# EAGLE board LibreRouter_MegaBoard (EAGLE 7.5.0), part 1 of 3
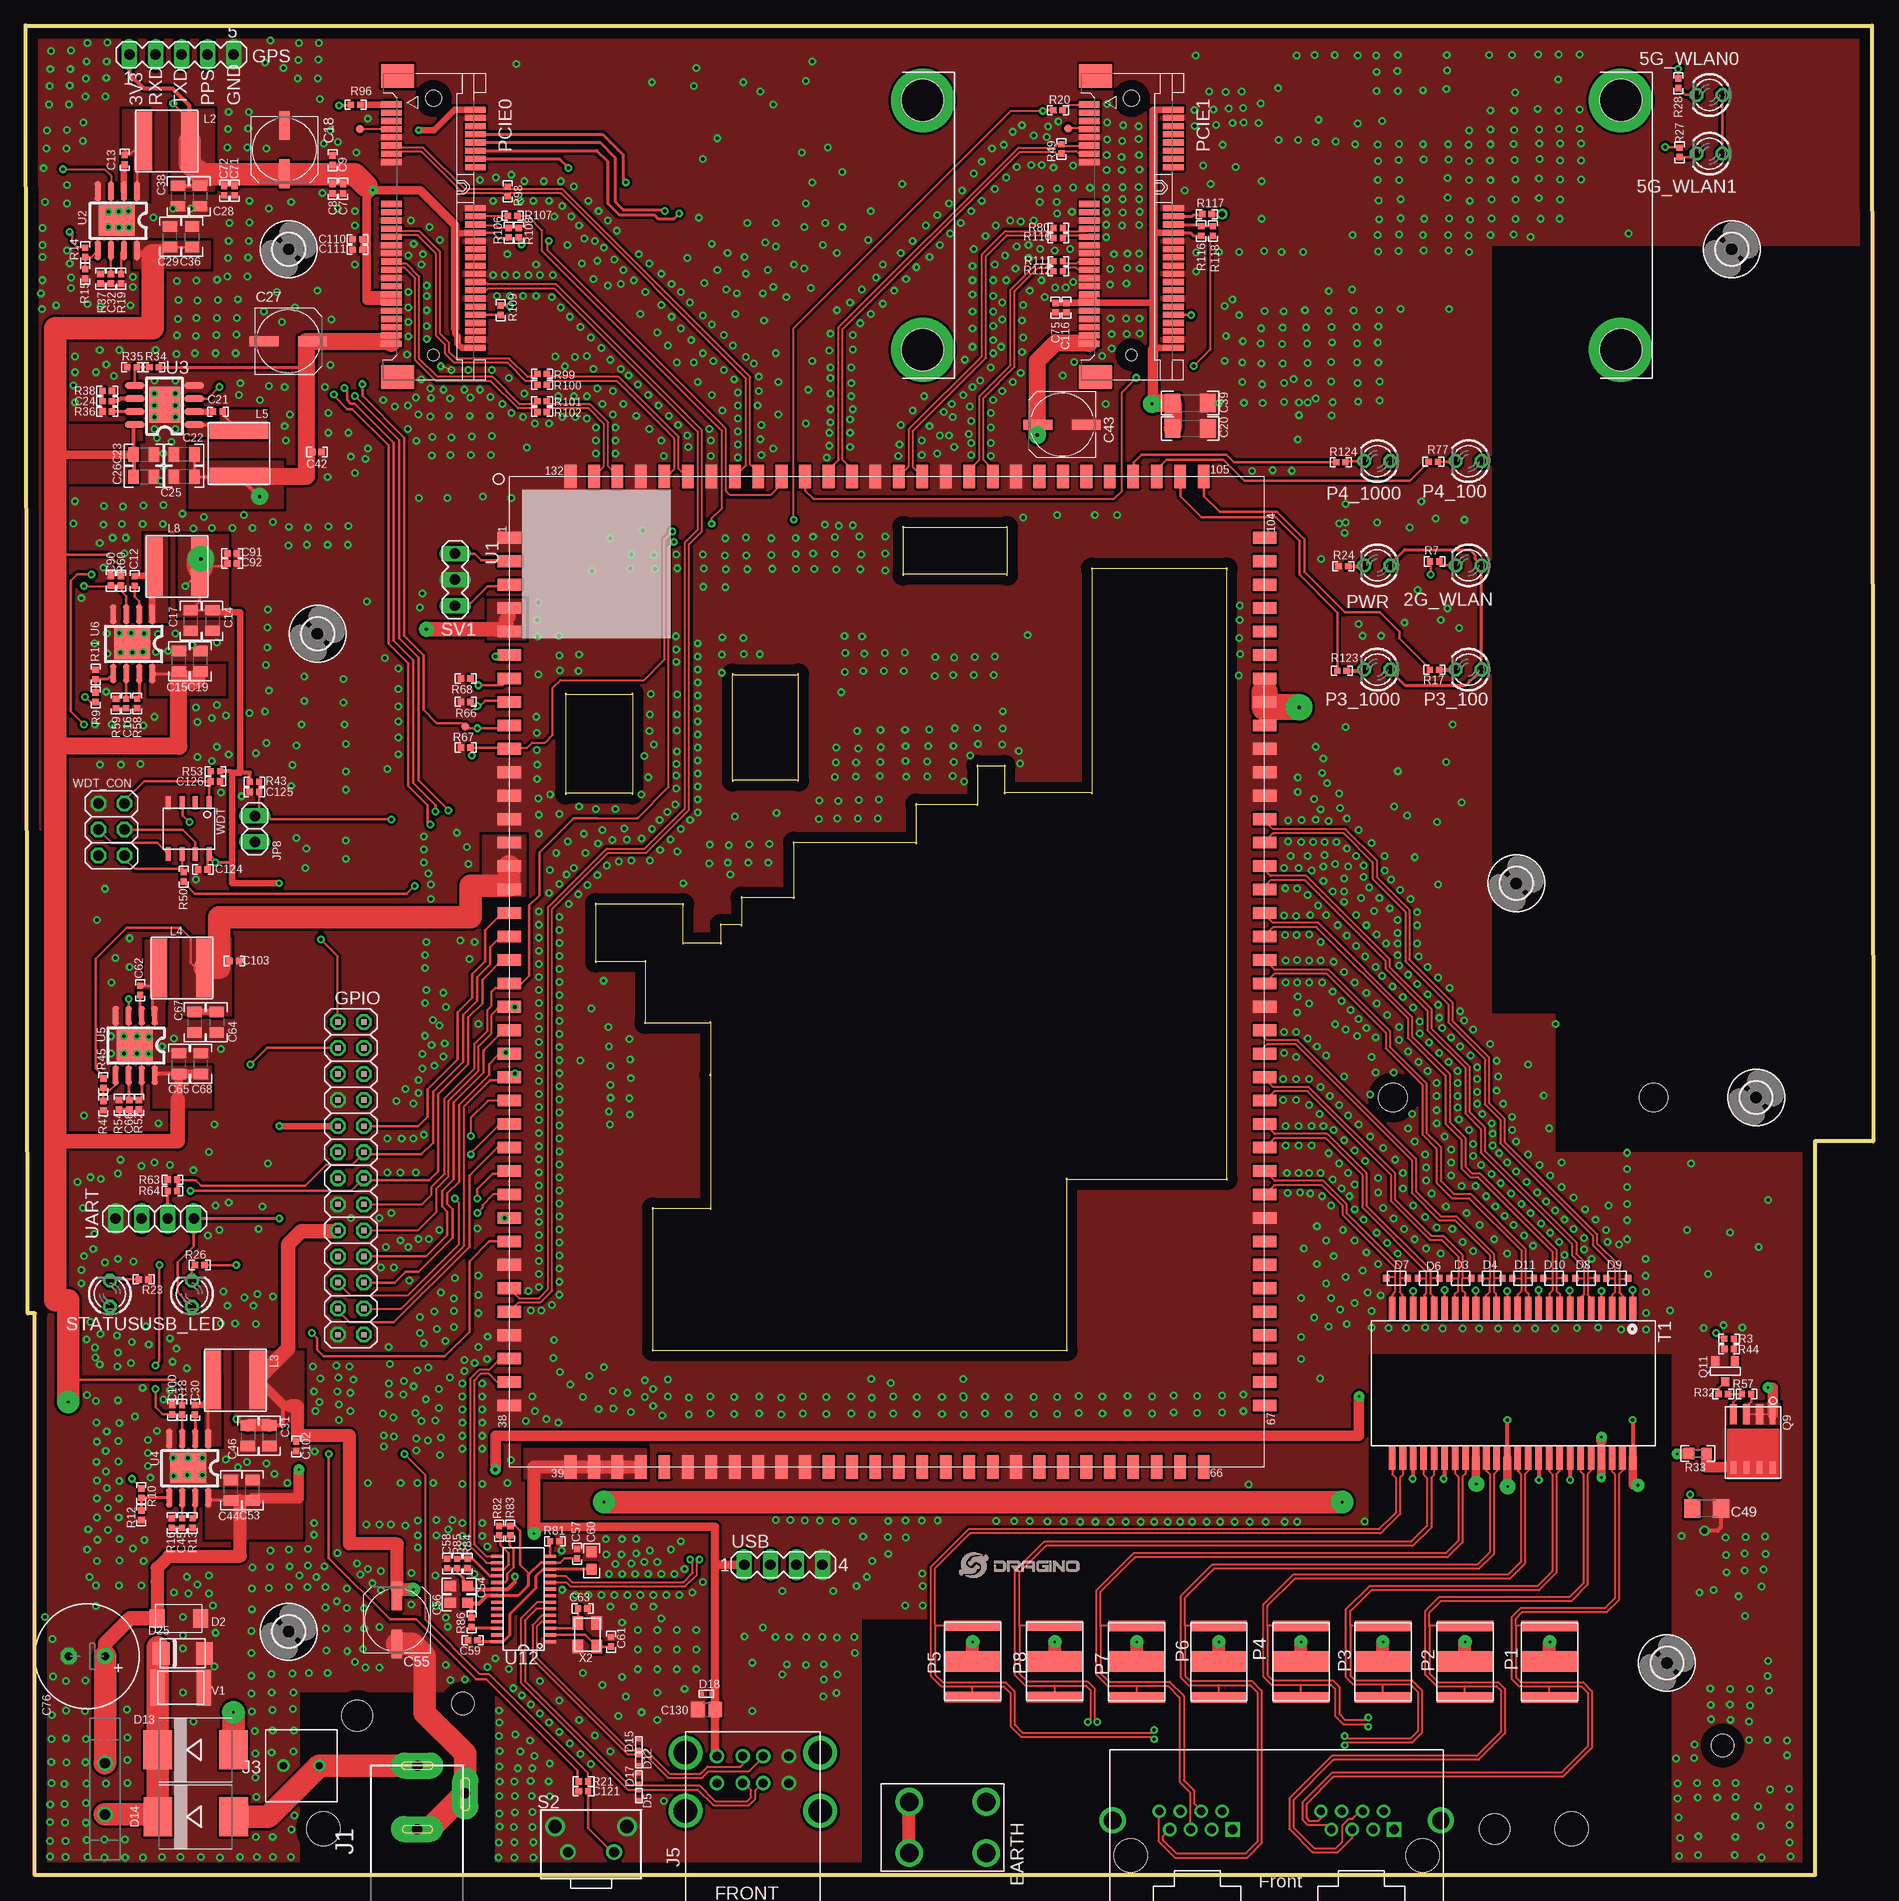
[diagram p0: board, top side]
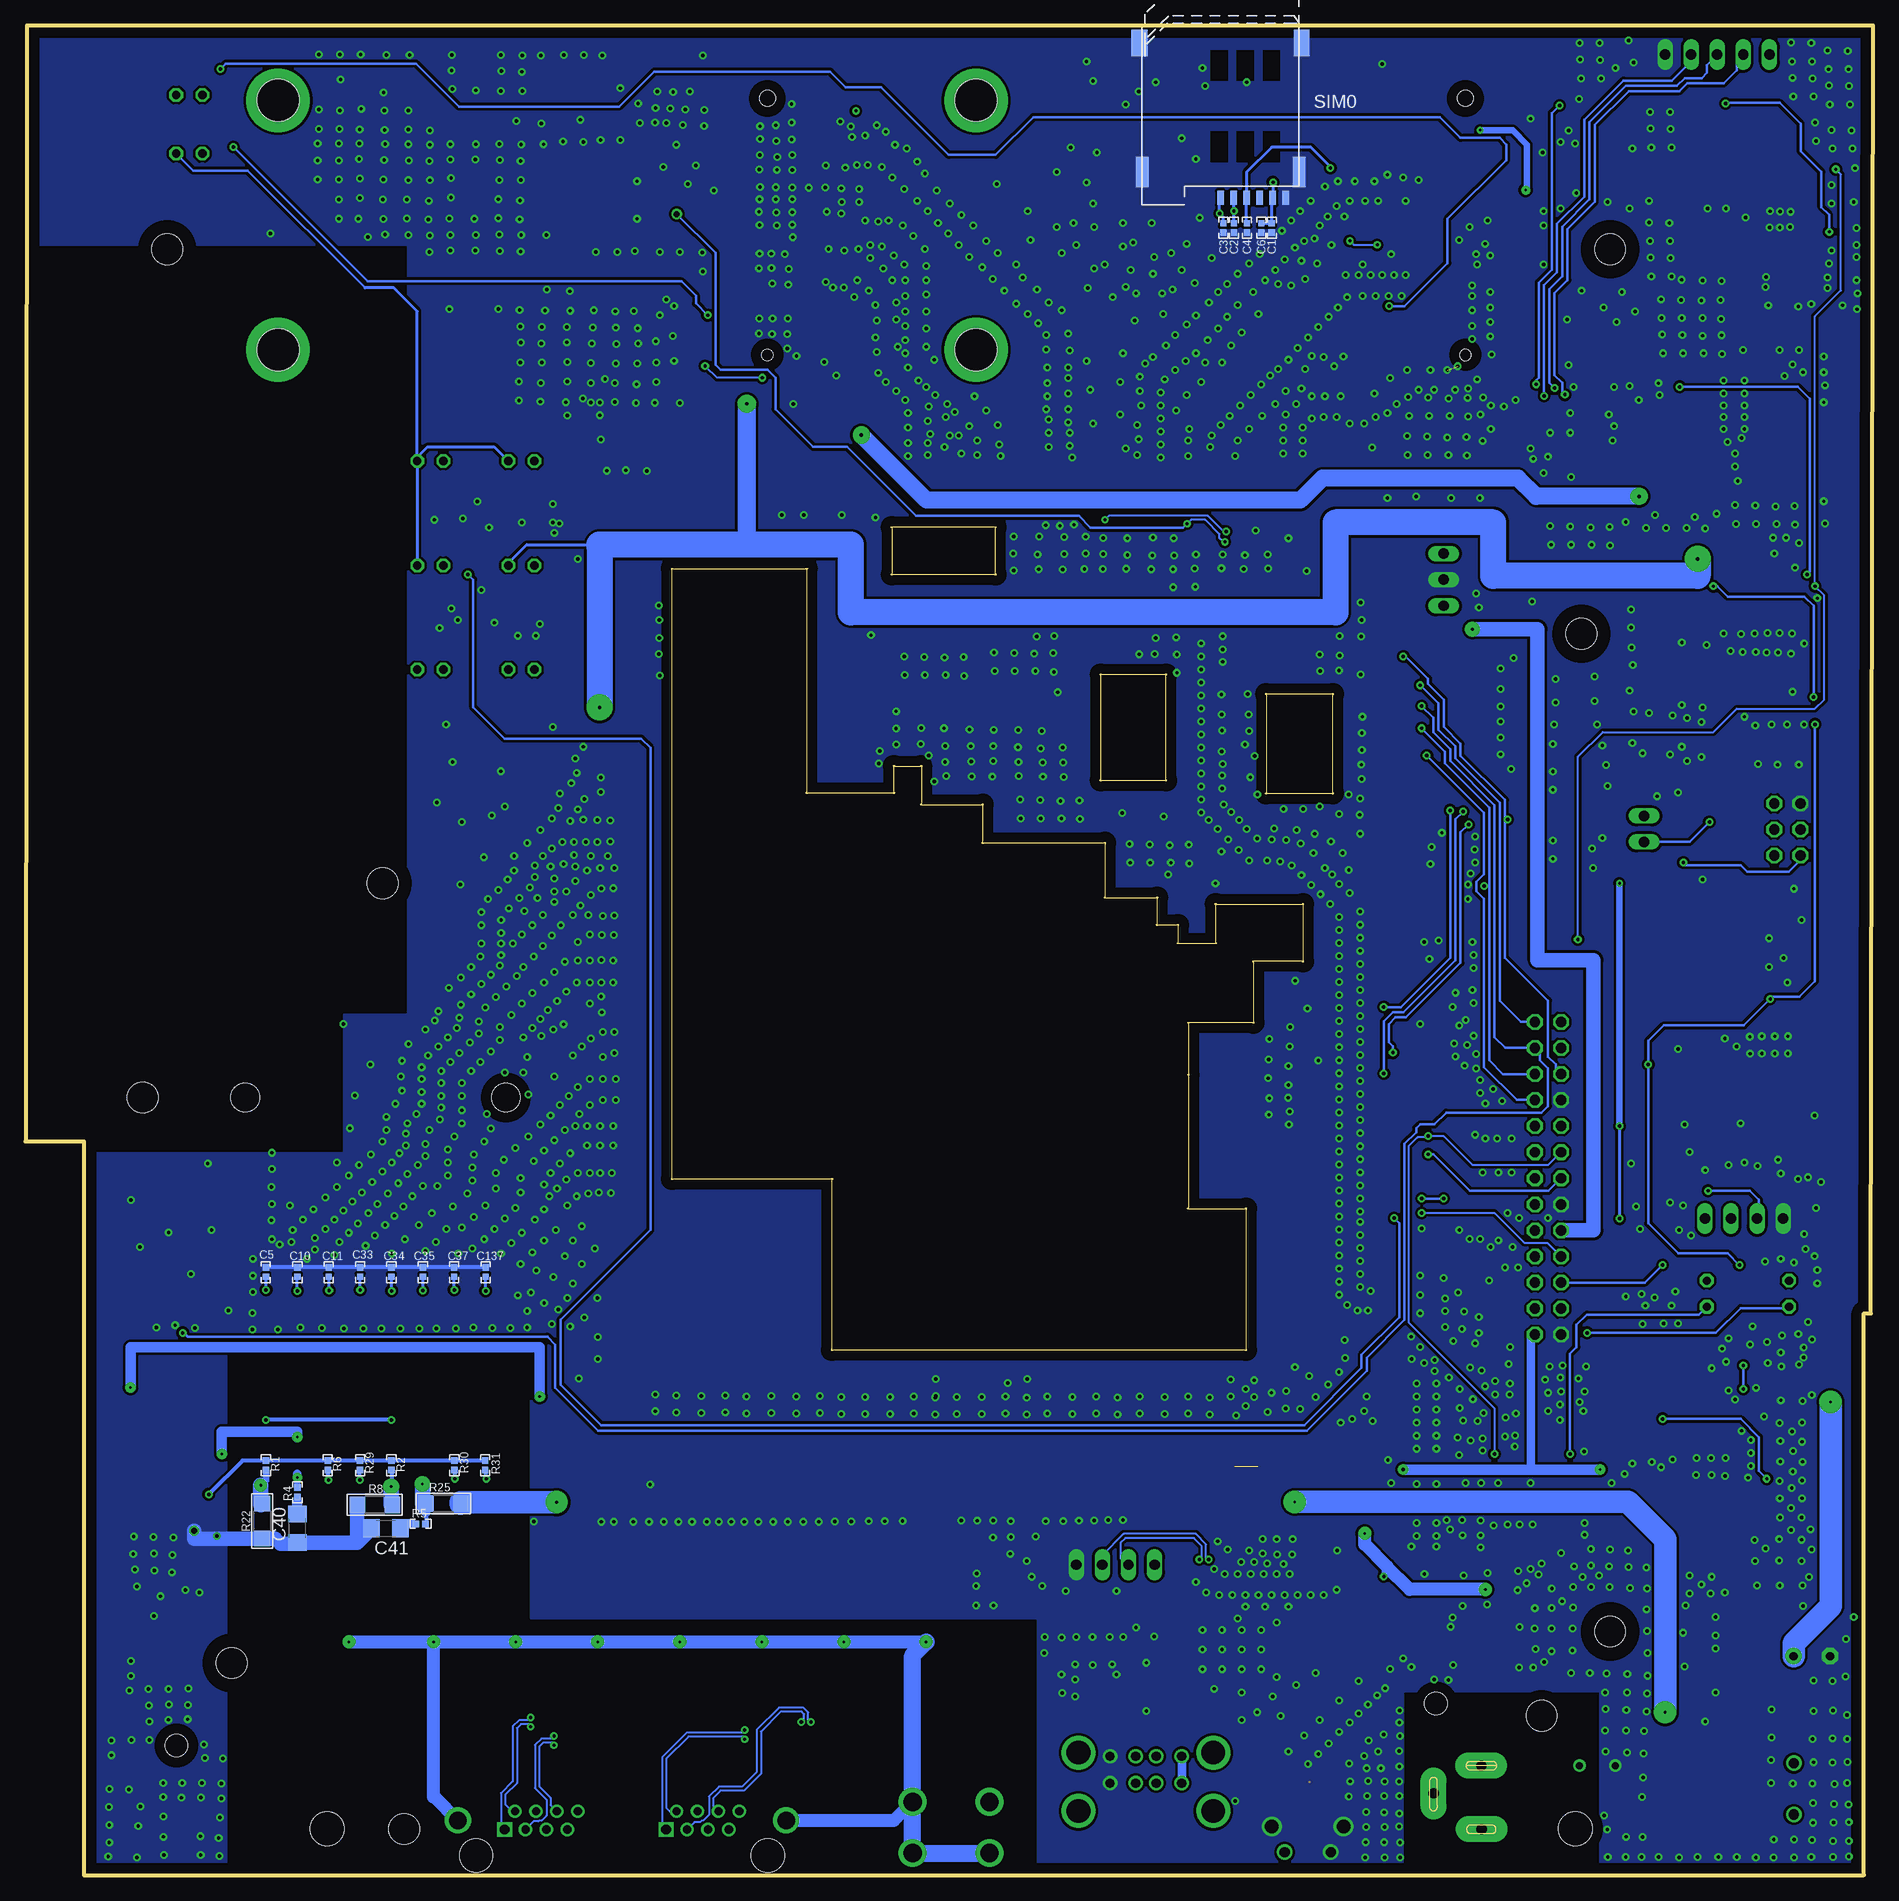
[diagram p1: board, bottom side, seen from below]

Size 180.12 x 180.27 mm. Coordinates in mm from the lower left corner, seen from the top.
Outline: 174.45,0 0.89,0 0.89,54.76 0.21,54.76 0,180.27 179.99,180.27 180.12,71.53 174.45,71.53 174.45,0
Copper layers (1*16): Top 0.035mm / dielectric 1.5mm / Bottom 0.035mm
Design rules "default *": minimum track width 8mil, minimum drill 12mil, track to track 6mil, track to pad 6mil, pad to pad 6mil, via to via 6mil, smd to smd 6mil, copper to edge 40mil, drill to drill 8mil, minimum pad ring 10mil, minimum via ring 8mil, stop-mask expansion 1mil, vias tented up to drill 30mil, thermal gap 10mil
Net classes: 0 default: width 0.203 mm, clearance 0.152 mm; 1 vcc: width 0.254 mm; 2 gnd: width 0.305 mm, drill 0.33 mm, clearance 0.254 mm; 3 usbvcc: width 0.254 mm, drill 0.61 mm, clearance 0.254 mm; 4 aref: width 0.406 mm, drill 0.61 mm, clearance 0.254 mm; 5 usbtrace: width 0.254 mm, clearance 0.152 mm; 6 usbtrace-4layer: width 0.191 mm, clearance 0.203 mm
Holes 3.3 mm at 29.03,4.52 150.73,4.52
Holes 3 mm at 32.33,15.52 143.21,4.5
Holes 2.2 mm at 42.63,16.72 165.43,12.62
Holes 2.8 mm at 133.31,75.79 158.71,75.79

## Footprints (pad centres in the part's own frame; a part is rotated, then mirrored left to right if it is on the bottom)
LED3MM = drill 0.813 octagon: A -1.27,0; K 1.27,0
C0402 = smd 0.61 x 0.61: 1 -0.457,0; 2 0.457,0
C0805 = smd 1 x 1.4: 1 -1,0; 2 1,0
UD-6,3X7,7_NICHICON = smd 2.8 x 1: + 2.35,0; - -2.35,0
C1206 = smd 1.52 x 1.8: 1 -1.71,0; 2 1.71,0
C1206' = smd 1.6 x 1.8: 1 -1.4,0; 2 1.4,0
C0603 = smd 1.1 x 1: 1 -0.85,0; 2 0.85,0
UD-6,3X5,8_NICHICON = smd 2.8 x 1: + 2.35,0; - -2.35,0
E3,5-10 = drill 0.813 pad 1.6: + -1.778,0 | drill 0.813 pad 1.6 octagon: - 1.778,0
C0805' = smd 1.3 x 1.5: 1 -0.85,0; 2 0.85,0
DO214AC = smd 1.45 x 1.8: A 2.13,0; C -2.13,0
SOD−323 = smd 0.6 x 0.7: P$1 -1.05,0; P$2 1.05,0
SOD−923 = smd 0.3 x 0.4: P$1 -0.45,0; P$2 0.45,0
SMC = smd 2.8 x 3.8: A 3.7,0; C -3.7,0
DO-214AA = smd 1.62 x 2.18: A 2.11,0; C -2.11,0
M4 = drill 1.8: 1 -3.75,2.5; 2 3.75,2.5; 3 -3.75,-2.5; 4 3.75,-2.5
2X13 = drill 1.016 octagon: 1 -15.24,-1.27; 2 -15.24,1.27; 3 -12.7,-1.27; 4 -12.7,1.27; 5 -10.16,-1.27; 6 -10.16,1.27; 7 -7.62,-1.27; 8 -7.62,1.27; 9 -5.08,-1.27; 10 -5.08,1.27; 11 -2.54,-1.27; 12 -2.54,1.27; 13 0,-1.27; 14 0,1.27; 15 2.54,-1.27; 16 2.54,1.27; 17 5.08,-1.27; 18 5.08,1.27; 19 7.62,-1.27; 20 7.62,1.27; 21 10.16,-1.27; 22 10.16,1.27; 23 12.7,-1.27; 24 12.7,1.27; 25 15.24,-1.27; 26 15.24,1.27
MA05-1 = drill 1.016 long: 1 -5.08,0; 2 -2.54,0; 3 0,0; 4 2.54,0; 5 5.08,0
3,0 = hole 3: 0,0
POWER_JACK_SLOT = drill 1 pad 2.54 long: GND@1 0,0; GND@2 4.7,3.5; PWR 0.04,6.2
ETHERNET-1X2 = drill 0.94 pad 1.27 square: 1-1 4.305,-2.54; 2-1 -11.445,-2.54 | drill 0.8: 1-2 5.325,-4.32; 1-3 6.345,-2.54; 1-4 7.365,-4.32; 1-5 8.385,-2.54; 1-6 9.405,-4.32; 1-7 10.425,-2.54; 1-8 11.445,-4.32; 2-2 -10.425,-4.32; 2-3 -9.405,-2.54; 2-4 -8.385,-4.32; 2-5 -7.365,-2.54; 2-6 -6.345,-4.32; 2-7 -5.325,-2.54; 2-8 -4.305,-4.32 | drill 1.7: S1 16,-3.43; S2 -16,-3.43 | hole 3.25: -14.225,0; 14.225,0
KF350-2P = drill 0.7: 1 -1.75,0; 2 1.75,0
USB-DUAL-JS-AF10-002 = drill 0.9: 1 0,3.5; 2 0,1; 3 0,-1; 4 0,-3.5; 5 -2.62,3.5; 6 -2.62,1; 7 -2.62,-1; 8 -2.62,-3.5 | drill 2.3: 9 0.35,6.57; 10 0.35,-6.57; 11 -5.33,6.57; 12 -5.33,-6.57
1X02 = drill 1.016 long: 1 -1.27,0; 2 1.27,0
GR72-135 = drill 1: P$1 -2.5,0; P$2 2.5,0
SWPA6028S = smd 5.7 x 1.7: P$1 0,2.25; P$2 0,-2.25
GDT-LT-B3D090L = smd 1 x 5.5: 1 -3.48,0; 3 3.48,0 | smd 2 x 5.5: 2 0,0
MINI-PCI-E-FULL = smd 0.6 x 2: 1 0.6,-4.1; 2 1.1,4.1; 3 1.4,-4.1; 4 1.9,4.1; 5 2.2,-4.1; 6 2.7,4.1; 7 3,-4.1; 8 3.5,4.1; 9 3.8,-4.1; 10 4.3,4.1; 11 4.6,-4.1; 12 5.1,4.1; 13 5.4,-4.1; 14 5.9,4.1; 15 6.2,-4.1; 16 6.7,4.1; 17 10.3,-4.1; 18 10.7,4.1; 19 11.1,-4.1; 20 11.5,4.1; 21 11.9,-4.1; 22 12.3,4.1; 23 12.7,-4.1; 24 13.1,4.1; 25 13.5,-4.1; 26 13.9,4.1; 27 14.3,-4.1; 28 14.7,4.1; 29 15.1,-4.1; 30 15.5,4.1; 31 15.9,-4.1; 32 16.3,4.1; 33 16.7,-4.1; 34 17.1,4.1; 35 17.5,-4.1; 36 17.9,4.1; 37 18.3,-4.1; 38 18.7,4.1; 39 19.1,-4.1; 40 19.5,4.1; 41 19.9,-4.1; 42 20.3,4.1; 43 20.7,-4.1; 44 21.1,4.1; 45 21.5,-4.1; 46 21.9,4.1; 47 22.3,-4.1; 48 22.7,4.1; 49 23.1,-4.1; 50 23.5,4.1; 51 23.9,-4.1; 52 24.3,4.1 | drill 4.09 pad 6.2: 53 0.2,47.7; 54 24.5,47.7 | smd 2.3 x 3.2: M1 27.15,-3.5; M2 -2.2,-3.5 | hole 1.55: 0,0 | hole 1.1: 25,0 | hole 4.09: 0.2,47.7; 24.5,47.7
SI4435 = smd 1.98 x 0.568: P$1 -2.66,1.905 | smd 1.98 x 0.69: P$2 -2.66,0.635; P$3 -2.66,-0.635; P$4 -2.66,-1.905 | smd 1.194 x 0.559: P$5 2.527,-1.905; P$6 2.527,-0.635; P$7 2.527,0.635; P$8 2.527,1.931
SOT-23 = smd 0.787 x 0.889: 1 0,-1.016; 2 -0.95,1.016; 3 0.95,1.016
R0402 = smd 0.61 x 0.61: 1 -0.457,0; 2 0.457,0
R1206 = smd 1.52 x 1.6: 1 -1.71,0; 2 1.71,0
R0603 = smd 1 x 1.1: 1 -0.85,0; 2 0.85,0
SWITCH_6X6X5 = drill 0.991 pad 1.524: 1 -2.25,0; 2 2.25,0 | drill 1.295 pad 1.905: 3 3.5,2.5; 4 -3.5,2.5
SIM-MICRO-PUSH = smd 0.65 x 1.35: CLK 7.91,15.105; GND 1.56,15.105; IO 6.64,15.105; RST 5.37,15.105; VCC 2.83,15.105; VPP 4.1,15.105 | smd 1.55 x 2.6: P$1 0,0; P$2 15.8,0 | smd 1.2 x 3: P$3 15.55,12.58; P$4 0.25,12.58
MA03-1 = drill 1.016 long: 1 -2.54,0; 2 0,0; 3 2.54,0
QT48103 = smd 2.34 x 0.64: 1 -7.27,11.65; 2 -7.27,10.63; 3 -7.27,9.61; 4 -7.27,8.59; 5 -7.27,7.57; 6 -7.27,6.55; 7 -7.27,5.53; 8 -7.27,4.51; 9 -7.27,3.49; 10 -7.27,2.47; 11 -7.27,1.45; 12 -7.27,0.43; 13 -7.27,-0.59; 14 -7.27,-1.61; 15 -7.27,-2.63; 16 -7.27,-3.65; 17 -7.27,-4.67; 18 -7.27,-5.69; 19 -7.27,-6.71; 20 -7.27,-7.73; 21 -7.27,-8.75; 22 -7.27,-9.77; 23 -7.27,-10.79; 24 -7.27,-11.81; 25 7.27,-11.81; 26 7.27,-10.77; 27 7.27,-9.77; 28 7.27,-8.75; 29 7.27,-7.73; 30 7.27,-6.71; 31 7.27,-5.69; 32 7.27,-4.67; 33 7.27,-3.65; 34 7.27,-2.63; 35 7.27,-1.61; 36 7.27,-0.59; 37 7.27,0.43; 38 7.27,1.45; 39 7.27,2.47; 40 7.27,3.49; 41 7.27,4.51; 42 7.27,5.53; 43 7.27,6.55; 44 7.27,7.57; 45 7.27,8.59; 46 7.27,9.61; 47 7.27,10.63; 48 7.27,11.65
TEST_POINT_0.8MM = smd 0.8 x 0.8: P$1 0,0
DRAGINO_CORE9558 = smd 1.14 x 2.29: 1 -35.941,-34.26; 2 -33.654,-34.26; 3 -31.369,-34.26; 4 -29.082,-34.26; 5 -26.797,-34.26; 6 -24.511,-34.26; 7 -22.224,-34.26; 8 -19.939,-34.26; 9 -17.652,-34.26; 10 -15.365,-34.26; 11 -13.081,-34.26; 12 -10.794,-34.26; 13 -8.508,-34.26; 14 -6.223,-34.26; 15 -3.937,-34.26; 16 -1.651,-34.26; 17 0.635,-34.26; 18 2.921,-34.26; 19 5.207,-34.26; 20 7.494,-34.26; 21 9.78,-34.26; 22 12.066,-34.26; 23 14.351,-34.26; 24 16.637,-34.26; 25 18.924,-34.26; 26 21.209,-34.26; 27 23.495,-34.26; 28 25.782,-34.26; 29 28.067,-34.26; 30 30.354,-34.26; 31 32.639,-34.26; 32 34.925,-34.26; 33 37.212,-34.26; 34 39.498,-34.26; 35 41.783,-34.26; 36 44.069,-34.26; 37 46.355,-34.26; 38 48.642,-34.26; 67 48.642,39.403; 68 46.355,39.403; 69 44.069,39.403; 70 41.783,39.403; 71 39.498,39.403; 72 37.212,39.403; 73 34.925,39.403; 74 32.639,39.403; 75 30.354,39.403; 76 28.067,39.403; 77 25.782,39.403; 78 23.495,39.403; 79 21.209,39.403; 80 18.924,39.403; 81 16.637,39.403; 82 14.351,39.403; 83 12.066,39.403; 84 9.78,39.403; 85 7.494,39.403; 86 5.207,39.403; 87 2.921,39.403; 88 0.635,39.403; 89 -1.651,39.403; 90 -3.937,39.403; 91 -6.223,39.403; 92 -8.508,39.403; 93 -10.794,39.403; 94 -13.081,39.403; 95 -15.365,39.403; 96 -17.652,39.403; 97 -19.939,39.403; 98 -22.224,39.403; 99 -24.511,39.403; 100 -26.797,39.403; 101 -29.082,39.403; 102 -31.369,39.403; 103 -33.654,39.403; 104 -35.941,39.403 | smd 2.29 x 1.14: 39 54.61,-28.286; 40 54.61,-26; 41 54.61,-23.714; 42 54.61,-21.428; 43 54.61,-19.142; 44 54.61,-16.856; 45 54.61,-14.57; 46 54.61,-12.284; 47 54.61,-9.998; 48 54.61,-7.712; 49 54.61,-5.426; 50 54.61,-3.14; 51 54.61,-0.854; 52 54.61,1.432; 53 54.61,3.718; 54 54.61,6.004; 55 54.61,8.29; 56 54.61,10.576; 57 54.61,12.862; 58 54.61,15.148; 59 54.61,17.434; 60 54.61,19.72; 61 54.61,22.006; 62 54.61,24.291; 63 54.61,26.577; 64 54.61,28.863; 65 54.61,31.149; 66 54.61,33.435; 105 -41.91,33.435; 106 -41.91,31.149; 107 -41.91,28.863; 108 -41.91,26.577; 109 -41.91,24.291; 110 -41.91,22.006; 111 -41.91,19.72; 112 -41.91,17.434; 113 -41.91,15.148; 114 -41.91,12.862; 115 -41.91,10.576; 116 -41.91,8.29; 117 -41.91,6.004; 118 -41.91,3.718; 119 -41.91,1.432; 120 -41.91,-0.854; 121 -41.91,-3.14; 122 -41.91,-5.426; 123 -41.91,-7.712; 124 -41.91,-9.998; 125 -41.91,-12.284; 126 -41.91,-14.57; 127 -41.91,-16.856; 128 -41.91,-19.142; 129 -41.91,-21.428; 130 -41.91,-23.714; 131 -41.91,-26; 132 -41.91,-28.288
RT8250-SOP8 = smd 1.88 x 0.61: 1 -1.219,0; 2 -1.219,-1.27; 3 -1.219,-2.54; 4 -1.219,-3.81; 5 4.547,-3.81; 6 4.547,-2.54; 7 4.547,-1.27; 8 4.547,0 | smd 2.997 x 3.505: 9 1.651,-1.956
USB_HUB_FE1.1S = smd 0.3 x 1.1: 1 -4.16,-2.6; 2 -3.52,-2.6; 3 -2.88,-2.6; 4 -2.24,-2.6; 5 -1.6,-2.6; 6 -0.96,-2.6; 7 -0.32,-2.6; 8 0.32,-2.6; 9 0.96,-2.6; 10 1.6,-2.6; 11 2.24,-2.6; 12 2.88,-2.6; 13 3.52,-2.6; 14 4.16,-2.6; 15 4.16,2.62; 16 3.52,2.62; 17 2.88,2.62; 18 2.24,2.62; 19 1.6,2.62; 20 0.96,2.62; 21 0.32,2.62; 22 -0.32,2.62; 23 -0.96,2.62; 24 -1.6,2.62; 25 -2.24,2.62; 26 -2.88,2.62; 27 -3.52,2.62; 28 -4.16,2.62
1X04 = drill 1.016 long: 1 -3.81,0; 2 -1.27,0; 3 1.27,0; 4 3.81,0
MA04-1 = drill 1.016 long: 1 -3.81,0; 2 -1.27,0; 3 1.27,0; 4 3.81,0
BC301N-D = smd 1.4 x 3.5: P$1 -2.25,0; P$2 2.25,0
S8S1 = smd 1.27 x 0.51: 1 -0.54,5.47; 2 -0.54,4.11; 3 -0.54,2.84; 4 -0.54,1.48; 5 4.46,1.48; 6 4.46,2.84; 7 4.46,4.11; 8 4.46,5.47
2X03 = drill 1.016 octagon: 1 -2.54,-1.27; 2 -2.54,1.27; 3 0,-1.27; 4 0,1.27; 5 2.54,-1.27; 6 2.54,1.27
SMARTPRJ_CRYSTAL-3.2-2.5 = smd 1.3 x 1.05: 1 -1.15,-0.925; 2 1.15,-0.925; 3 1.15,0.925; 4 -1.15,0.925

## Placement (x,y rotation side)
2G_WLAN  3mm/GREEN  [LED3MM]  140.67,127.66 180 top
5G_WLAN0  3mm/BLUE  [LED3MM]  164.17,173.51 180 top
5G_WLAN1  3mm/GREEN  [LED3MM]  164.17,167.79 180 top
C1  10pF  [C0402]  58.63,160.55 270 bottom
C2  33pF  [C0402]  62.31,160.55 270 bottom
C3  33pF  [C0402]  63.33,160.55 270 bottom
C4  33pF  [C0402]  61.04,160.55 270 bottom
C5  0.1u 10v  [C0402]  156.7,58.78 270 bottom
C6  0.1u  [C0402]  59.65,160.55 270 bottom
C7  33pf  [C0402]  30.94,164.36 270 top
C8  10pf  [C0402]  29.93,164.36 270 top
C9  33pf  [C0402]  29.93,167.16 90 top
C10  0.1u 10v  [C0402]  153.63,58.78 270 bottom
C11  0.1u 10v  [C0402]  150.57,58.78 270 bottom
C12  0.1u,10v  [C0402]  10.62,126.14 90 top
C13  0.1u,10v  [C0402]  9.66,167.18 90 top
C14  22uF,10v  [C0805]  18.22,122.28 270 top
C15  10uf,35v  [C0805]  14.94,118.31 90 top
C16  2.7nf  [C0402]  9.81,114.2 90 top
C17  22uF,10v  [C0805]  16.09,122.28 270 top
C18  470uF,JLC-C116423  [UD-6,3X7,7_NICHICON]  25.23,168.17 270 top
C19  10uf,35v  [C0805]  17.05,118.31 90 top
C20  47uF,6.3V  [C1206]  113.55,141.02 0 top
C21  0.1u,10v  [C0402]  18.75,142.65 0 top
C22  22fu,10v  [C0805]  15.45,138.46 180 top
C23  10uf,35v  [C0805]  11.51,138.46 0 top
C24  2.7nf  [C0402]  7.96,143.66 0 top
C25  22uf,10v  [C0805]  15.45,136.3 180 top
C26  10uf,35v  [C0805]  11.51,136.3 0 top
C27  470uF,JLC-C116423  [UD-6,3X7,7_NICHICON]  25.61,149.5 0 top
C28  22uF,10v  [C0805]  17,163.65 270 top
C29  10uf,35v  [C0805]  14.08,159.69 90 top
C30  0.1u,10v  [C0402]  16.52,45.36 90 top
C31  22fu,10v  [C0805]  23.78,42.82 270 top
C32  2.7nf  [C0402]  8.31,155.6 90 top
C33  0.1u 10v  [C0402]  147.51,58.78 270 bottom
C34  0.1u 10v  [C0402]  144.46,58.78 270 bottom
C35  0.1u 10v  [C0402]  141.38,58.78 270 bottom
C36  10uf,35v  [C0805]  16.24,159.69 90 top
C37  0.1u 10v  [C0402]  138.34,58.78 270 bottom
C38  22uF,10v  [C0805]  14.84,163.65 270 top
C39  47uF,6.3V  [C1206]  113.55,143.48 0 top
C40  10nf 2kv  [C1206']  153.63,33.81 90 bottom
C41  10nf 2kv  [C1206']  144.99,33.81 0 bottom
C42  0.1u,10v  [C0402]  28.4,138.71 180 top
C43  470uF,JLC-C116423  [UD-6,3X7,7_NICHICON]  101.05,141.38 180 top
C44  10uf,35v  [C0805]  20.02,37.52 90 top
C45  2.7nf  [C0402]  15.27,34.32 90 top
C46  22uf,10v  [C0805]  21.67,42.82 270 top
C49  10nf 2kv  [C1206']  163.89,35.74 180 top
C53  10uf,35v  [C0805]  22.13,37.52 90 top
C54  10uf 10v  [C0603]  42.25,28.17 180 top
C55  100uF 16v C128532  [UD-6,3X5,8_NICHICON]  36.2,24.87 90 top
C56  10uf 10v  [C0603]  42.25,26.54 180 top
C57  0.1u  [C0402]  53.75,31.32 90 top
C58  0.1u  [C0402]  41.1,30.38 90 top
C59  0.1u  [C0402]  43.59,22.89 180 top
C60  10uf 10v  [C0603]  55.18,30.66 90 top
C61  18pF  [C0402]  57.08,22.73 270 top
C62  0.1u,10v  [C0402]  11.16,86.23 90 top
C63  18pF  [C0402]  54.31,25.98 180 top
C64  22fu,10v  [C0805]  18.63,83.13 270 top
C65  10uf,35v  [C0805]  14.94,79.1 90 top
C66  2.7nf  [C0402]  10.12,75.08 90 top
C67  22uf,10v  [C0805]  16.47,83.13 270 top
C68  10uf,35v  [C0805]  17.1,79.1 90 top
C71  0.1u,10v  [C0402]  20.38,164.19 90 top
C72  0.1u,10v  [C0402]  19.36,164.19 90 top
C75  0.1uf  [C0402]  100.41,152.78 270 top
C76  1000uF, 35v, C136014  [E3,5-10]  5.98,21.34 180 top
C90  0.1u,50v  [C0402]  8.29,126.16 270 top
C91  0.1u,10v  [C0402]  20.15,128.83 180 top
C92  0.1u,10v  [C0402]  20.15,127.84 180 top
C100  0.1u,50v  [C0402]  14.28,45.36 270 top
C102  0.1u,10v  [C0402]  26.37,41.78 90 top
C103  0.1u,10v  [C0402]  20.35,89.1 180 top
C110  0.1uf  [C0402]  32.34,159.44 180 top
C111  0.1uf  [C0402]  32.34,158.42 180 top
C116  0.1uf  [C0402]  101.48,152.78 270 top
C121  0.1u 10v  [C0402]  54.39,8.18 180 top
C124  0.1uF  [C0402]  17.28,98.02 0 top
C125  0.01uF  [C0402]  22.31,105.56 0 top
C126  0.01uF  [C0402]  18.5,106.6 180 top
C130  10uF,10v  [C0805']  66.38,16.15 0 top
C137  0.1u 10v  [C0402]  135.27,58.78 270 bottom
D2  SS14  [DO214AC]  14.94,25.02 0 top
D3  BS05C  [SOD−323]  139.89,58.17 0 top
D4  BS05C  [SOD−323]  142.93,58.17 0 top
D5  ESD7951ST5G  [SOD−923]  59.77,7.77 90 top
D6  BS05C  [SOD−323]  136.79,58.17 0 top
D7  BS05C  [SOD−323]  133.69,58.17 0 top
D8  BS05C  [SOD−323]  152.13,58.17 0 top
D9  BS05C  [SOD−323]  155.18,58.17 0 top
D10  BS05C  [SOD−323]  149.03,58.17 0 top
D11  BS05C  [SOD−323]  146.01,58.17 0 top
D12  ESD7951ST5G  [SOD−923]  59.77,11.2 90 top
D13  MBRS540T3  [SMC]  16.57,12.22 0 top
D14  MBRS540T3  [SMC]  16.59,5.69 0 top
D15  ESD7951ST5G  [SOD−923]  59.77,12.73 270 top
D17  ESD7951ST5G  [SOD−923]  59.77,9.42 270 top
D18  ESD7951ST5G  [SOD−923]  66.38,17.68 0 top
D25  SMBJ40CA  [DO-214AA]  15.32,21.62 0 top
EARTH  M4  [M4]  89.9,4.65 180 top
GPIO  [2X13]  31.71,67.92 270 top
GPS  NL  [MA05-1]  15.2,177.44 0 top
H1  [3,0]  166.33,158.46 0 top
H2  [3,0]  25.64,158.46 0 top
H3  [3,0]  28.46,121 0 top
H4  [3,0]  145.32,96.67 0 top
H5  [3,0]  25.64,23.74 0 top
H6  [3,0]  160.03,20.67 0 top
H7  [3,0]  168.71,75.79 0 top
J1  POWER_JACKSLT  [POWER_JACK_SLOT]  38.16,4.47 0 top
J2  ETHERNET_2PORT  [ETHERNET-1X2]  121.98,1.91 180 top
J3  CON-2P  [KF350-2P]  26.88,10.67 180 top
J5  USB-CON-A-DUAL  [USB-DUAL-JS-AF10-002]  70.9,11.58 90 top
JP8  [1X02]  22.33,101.98 270 top
L1  4A,GR30-400  [GR72-135]  7.73,8.41 90 top
L2  4.7uH /SWPA6045S4R7MT  [SWPA6028S]  13.75,169.01 90 top
L3  6.8uH / SWPA6045S6R8MT  [SWPA6028S]  20.45,48.23 90 top
L4  6.8uH / SWPA6045S6R8MT  [SWPA6028S]  15.22,88.42 90 top
L5  6.8uH / SWPA6045S6R8MT  [SWPA6028S]  20.78,138.58 0 top
L8  4.7uH /SWPA6045S4R7MT  [SWPA6028S]  14.74,127.56 90 top
P1  3R420L  [GDT-LT-B3D090L]  148.58,20.8 270 top
P2  3R420L  [GDT-LT-B3D090L]  140.34,20.8 270 top
P3  3R420L  [GDT-LT-B3D090L]  132.34,20.8 270 top
P3_100  3mm/RED  [LED3MM]  140.67,117.5 180 top
P3_1000  3mm/BLUE  [LED3MM]  131.78,117.5 180 top
P4  3R420L  [GDT-LT-B3D090L]  124.34,20.8 270 top
P4_100  3mm/RED  [LED3MM]  140.67,137.82 180 top
P4_1000  3mm/GREEN  [LED3MM]  131.78,137.82 180 top
P5  3R420L  [GDT-LT-B3D090L]  92.34,20.83 270 top
P6  3R420L  [GDT-LT-B3D090L]  116.34,20.8 270 top
P7  3R420L  [GDT-LT-B3D090L]  108.34,20.8 270 top
P8  3R420L  [GDT-LT-B3D090L]  100.34,20.83 270 top
PCIE0  f5521gw  [MINI-PCI-E-FULL]  39.76,173.18 270 top
PCIE1  f5521gw  [MINI-PCI-E-FULL]  107.81,173.18 270 top
PWR  3mm/RED  [LED3MM]  131.78,127.66 180 top
Q9  Si4435DDY-T1  [SI4435]  168.41,42.27 270 top
Q11  BSS138-7-F  [SOT-23]  165.69,49.1 0 top
R1  75R  [R0402]  156.69,39.95 90 bottom
R2  75R,NL  [R0402]  144.46,39.95 90 bottom
R3  4K7  [R0402]  166.07,52.28 180 top
R4  75R  [R0402]  153.62,37.31 270 bottom
R5  75R  [R0402]  141.61,34.23 180 bottom
R6  75R  [R0402]  150.66,39.95 90 bottom
R7  330  [R0402]  137.37,128.04 0 top
R8  0R  [R1206]  146.08,36.09 180 bottom
R9  75K 1%  [R0402]  6.81,114.81 270 top
R10  53.6K 1%  [R0402]  11.29,37.24 90 top
R11  24K 1%  [R0402]  6.81,117.02 270 top
R12  10K 1%  [R0402]  11.29,35.08 90 top
R13  180K  [R0402]  16.29,34.32 270 top
R14  75K 1%  [R0402]  5.8,158.17 90 top
R15  24K 1%  [R0402]  5.8,156.08 90 top
R16  24K  [R0402]  14.23,34.32 90 top
R17  330  [R0402]  137.36,117.47 0 top
R18  100K  [R0402]  15.27,45.36 270 top
R19  180K  [R0402]  9.33,155.6 270 top
R20  NL  [R0402]  100.64,172.01 0 top
R21  330  [R0402]  54.39,9.12 180 top
R22  OR  [R1206]  157.06,34.52 270 bottom
R23  330  [R0402]  11.51,58.06 180 top
R24  330  [R0402]  128.47,127.58 0 top
R25  OR  [R1206]  139.4,36.22 0 bottom
R26  330  [R0402]  16.97,59.46 180 top
R27  330  [R0402]  161.25,167.92 270 top
R28  330  [R0402]  161.12,174.65 270 top
R29  75R  [R0402]  147.52,39.95 90 bottom
R30  75R  [R0402]  138.32,39.95 90 bottom
R31  75R  [R0402]  135.32,39.95 90 bottom
R32  68K  [R0402]  165.51,46.89 0 top
R33  0R 1/10W  [R0603]  163.02,41.1 180 top
R34  53.6K 1%  [R0402]  12.53,146.96 0 top
R35  10K 1%  [R0402]  10.37,146.96 0 top
R36  180K  [R0402]  7.96,142.65 180 top
R37  47K 1%  [R0402]  7.3,155.6 270 top
R38  24K  [R0402]  7.96,144.68 0 top
R43  10k  [R0402]  22.31,106.58 180 top
R44  47K  [R0402]  166.07,51.27 180 top
R45  53.6K 1%  [R0402]  7.58,77.19 90 top
R47  10K 1%  [R0402]  7.58,75.01 90 top
R49  NL  [R0402]  101,168.25 270 top
R50  0R  [R0402]  15.4,97.31 90 top
R52  180K  [R0402]  11.06,75.08 270 top
R53  10k  [R0402]  18.5,107.59 0 top
R54  24K  [R0402]  9.1,75.08 90 top
R57  100K  [R0402]  167.77,46.89 180 top
R58  180K  [R0402]  10.88,114.2 270 top
R59  47K 1%  [R0402]  8.8,114.2 270 top
R60  100K  [R0402]  9.3,126.16 270 top
R63  10k  [R0402]  14.31,67.79 0 top
R64  10k  [R0402]  14.31,66.67 0 top
R66  10k  [R0402]  42.91,114.35 180 top
R67  10k  [R0402]  42.91,109.91 180 top
R68  10k  [R0402]  42.91,116.64 180 top
R77  330  [R0402]  137.23,137.77 0 top
R80  0R  [R0402]  100.67,160.55 0 top
R81  2.7K 1%  [R0402]  51.6,32.54 180 top
R82  100k  [R0402]  46.16,33.58 90 top
R83  100k  [R0402]  47.25,33.58 90 top
R84  100k  [R0402]  43.09,30.38 90 top
R85  47K  [R0402]  42.07,30.38 270 top
R86  100k  [R0402]  43.47,24.64 90 top
R96  NL  [R0402]  32.16,172.57 0 top
R98  NL  [R0402]  47,164.11 270 top
R99  0R  [R0402]  50.35,146.33 180 top
R100  0R  [R0402]  50.35,145.26 180 top
R101  0R  [R0402]  50.35,143.66 180 top
R102  0R  [R0402]  50.35,142.62 180 top
R106  1.5K  [R0402]  47.1,160.1 90 top
R107  0R  [R0402]  47.48,161.75 0 top
R108  0R  [R0402]  48.09,160.1 270 top
R109  0R  [R0402]  46.31,152.53 90 top
R110  0R  [R0402]  100.67,159.56 0 top
R111  0R  [R0402]  100.67,157.3 0 top
R112  0R  [R0402]  100.67,156.34 0 top
R116  1.5K  [R0402]  114.61,160.25 90 top
R117  0R  [R0402]  115.17,161.9 0 top
R118  0R  [R0402]  115.76,160.25 270 top
R123  330  [R0402]  128.34,117.4 0 top
R124  330  [R0402]  128.22,137.72 0 top
S2  [SWITCH_6X6X5]  55.13,2.24 0 top
SIM0  SIM_CARD_CON_6MICRO  [SIM-MICRO-PUSH]  55.71,178.59 180 bottom
STATUS  3mm/GREEN  [LED3MM]  8.21,56.67 90 top
SV1  NL  [MA03-1]  41.87,126.26 270 top
T1  QT48A03  [QT48103]  145.04,47.93 270 top
TP1  TEST-POINT0.8MM  [TEST_POINT_0.8MM]  32.6,170.18 90 top
TP2  TEST-POINT0.8MM  [TEST_POINT_0.8MM]  101.63,170.26 90 top
TP3  TEST-POINT0.8MM  [TEST_POINT_0.8MM]  42.86,111.94 0 top
U1  CORE9558_V2  [DRAGINO_CORE9558]  81.41,94.41 270 top
U2  RT7272  [RT8250-SOP8]  10.85,162.92 270 top
U3  RT7272  [RT8250-SOP8]  15.2,141.38 180 top
U4  RT7272  [RT8250-SOP8]  17.81,41.33 270 top
U5  RT7272  [RT8250-SOP8]  12.58,82.52 270 top
U6  RT7272  [RT8250-SOP8]  12.35,121.67 270 top
U12  USB_HUB_FE1.1S  [USB_HUB_FE1.1S]  48.55,26.92 90 top
U$1  [LOGO-SILK-NEW]  91.02,28.98 0 top
UART  [1X04]  12.58,63.98 180 top
USB  NL  [MA04-1]  73.87,30.25 0 top
USB_LED  3mm/BLUE  [LED3MM]  16.21,56.67 90 top
V1  BC301N-D  [BC301N-D]  15.12,18.26 180 top
WDT  ATTINY13  [S8S1]  12.43,103.99 270 top
WDT_CON  [2X03]  8.36,101.9 90 top
X2  YSX321SL 12Mhz  [SMARTPRJ_CRYSTAL-3.2-2.5]  54.77,23.42 270 top

## Library data of the parts
2G_WLAN 5G_WLAN0 5G_WLAN1 P3_100 P3_1000 P4_100 P4_1000 PWR STATUS USB_LED = led
C1-C5 C10-C13 C16 C18 C21 C24 C27 C30 C32-C35 C37 C40-C43 C45 C49 C55 C62 C66 C71 C72 C76 C90-C92 C100 C102 C103 C121 C130 C137 D2-D12 D15 D17 D18 D25 EARTH J1 J2 J5 L1 P1-P8 Q9 R1-R38 R43-R45 R47 R49 R50 R52-R54 R57-R60 R63 R64 R66-R68 R77 R80-R86 R96 R98-R102 R106-R112 R116-R118 R123 R124 S2 T1 U1-U6 U12 U$1 V1 = dragino
C6-C9 C14 C15 C17 C19 C20 C22 C23 C25 C26 C28 C29 C31 C36 C38 C39 C44 C46 C53 C54 C56-C61 C63-C65 C67 C68 C75 C110 C111 C116 C124-C126 D13 D14 J3 L2-L5 L8 SIM0 TP1-TP3 X2 = dragino-passive
GPIO JP8 UART WDT_CON = pinhead
GPS SV1 USB = con-lstb; OC_FARNELL: unknown; OC_NEWARK: unknown
H1-H7 = holes
PCIE0 PCIE1 = dragino; MPN: 67910-5700; OC_FARNELL: unknown; OC_NEWARK: 93M2128
Q11 = dragino; OC_FARNELL: unknown; OC_NEWARK: unknown
WDT = din

## Nets
5G_WLAN_LED_0: R28.1 R109.2
5G_WLAN_LED_1: PCIE1.44 R27.1
5V0_2GPA: C64.1 C67.1 C103.2 L4.P$2 R45.2 U1.14 U1.15 U1.16
5V_1: C31.1 C46.1 C54.1 C55.+ C58.1 C102.2 C130.2 D18.P$2 GPIO.17 J5.1 J5.5 L3.P$2 R10.2 R85.2 U1.4 U1.5 U1.39 U1.40 U1.41 U1.42 U1.43 U12.20 USB.1
5V_PCIE: C22.1 C25.1 C27.+ C42.2 C43.+ L5.P$2 PCIE0.49 PCIE0.51 PCIE1.49 PCIE1.51 R34.2
+3V3: 2G_WLAN.A 5G_WLAN0.A 5G_WLAN1.A C14.1 C17.1 C20.1 C39.1 C75.1 C91.2 C92.2 C116.1 C124.2 GPIO.9 L8.P$2 P3_100.A P3_1000.A P4_100.A P4_1000.A PCIE1.2 PCIE1.24 PCIE1.39 PCIE1.41 PCIE1.52 PWR.A R9.2 R21.2 R43.2 R53.2 R116.1 U1.96 U1.97 U1.98 UART.1 USB_LED.A WDT.8 WDT_CON.2
+3V3_PCIE: C7.1 C8.1 C9.1 C18.+ C28.1 C38.1 C71.2 C72.2 C110.1 C111.1 GPS.1 L2.P$2 PCIE0.2 PCIE0.24 PCIE0.39 PCIE0.41 PCIE0.52 R14.2 R106.1
+12V: C15.1 C19.1 C23.1 C26.1 C29.1 C36.1 C44.1 C53.1 C65.1 C68.1 C76.+ D2.C GPIO.26 L1.P$2 Q9.P$1 Q9.P$2 Q9.P$3 R18.1 R57.1 R60.1 U2.8 U3.8 U4.8 U5.8 U6.8
/WT_RST: C126.2 R53.1 WDT.1 WDT_CON.5
AGND: EARTH.1 EARTH.2 EARTH.3 EARTH.4 J2.S1 J2.S2 P1.2 P2.2 P3.2 P4.2 P5.2 P6.2 P7.2 P8.2
CLKREQ_L_0: PCIE0.7 TP1.P$1
CLKREQ_L_1: PCIE1.7 TP2.P$1
COM_A_2G: SV1.1 U1.2
COM_B_2G: SV1.3 U1.3
CON_PER0_N: PCIE0.23 R99.2
CON_PER0_P: PCIE0.25 R100.2
CON_PER1_N: PCIE1.23 R80.2
CON_PER1_P: PCIE1.25 R110.2
CON_PET0_N: PCIE0.31 R101.2
CON_PET0_P: PCIE0.33 R102.2
CON_PET1_N: PCIE1.31 R111.2
CON_PET1_P: PCIE1.33 R112.2
GND [gnd]: C1.2 C2.2 C3.2 C4.2 C5.1 C6.2 C7.2 C8.2 C9.2 C10.1 C11.1 C14.2 C15.2 C17.2 C18.- C19.2 C20.2 C22.2 C23.2 C25.2 C26.2 C27.- C28.2 C29.2 C31.2 C33.1 C34.1 C35.1 C36.2 C37.1 C38.2 C39.2 C40.1 C41.1 C42.1 C43.- C44.2 C46.2 C49.1 C53.2 C54.2 C55.- C56.2 C57.2 C58.2 C59.2 C60.2 C61.1 C63.1 C64.2 C65.2 C67.2 C68.2 C71.1 C72.1 C75.2 C76.- C90.1 C91.1 C92.1 C100.1 C102.1 C103.1 C110.2 C111.2 C116.2 C121.2 C124.1 C125.1 C126.1 C130.1 C137.1 D2.A D5.P$1 D12.P$1 D15.P$1 D17.P$1 D18.P$1 D25.A GPIO.7 GPIO.15 GPIO.25 GPS.5 J1.GND@1 J1.GND@2 J3.2 J5.4 J5.8 PCIE0.4 PCIE0.9 PCIE0.15 PCIE0.18 PCIE0.21 PCIE0.26 PCIE0.27 PCIE0.29 PCIE0.34 PCIE0.35 PCIE0.40 PCIE0.43 PCIE0.50 PCIE1.4 PCIE1.9 PCIE1.15 PCIE1.18 PCIE1.21 PCIE1.26 PCIE1.27 PCIE1.29 PCIE1.34 PCIE1.35 PCIE1.37 PCIE1.40 PCIE1.43 PCIE1.50 Q11.2 R8.2 R11.1 R12.1 R13.2 R15.1 R16.2 R19.2 R22.2 R23.1 R24.1 R35.1 R36.2 R37.1 R38.2 R44.2 R47.1 R52.2 R54.2 R58.2 R59.1 R63.1 R66.2 R67.2 R68.2 R81.1 R84.1 S2.1 S2.3 S2.4 SIM0.GND SIM0.P$1 SIM0.P$2 SIM0.P$3 SIM0.P$4 SV1.2 U1.1 U1.11 U1.12 U1.13 U1.32 U1.35 U1.38 U1.44 U1.45 U1.46 U1.47 U1.48 U1.49 U1.58 U1.75 U1.84 U1.93 U1.94 U1.95 U1.113 U1.116 U1.119 U1.126 U1.129 U1.132 U2.4 U2.9 U3.4 U3.9 U4.4 U4.9 U5.4 U5.9 U6.4 U6.9 U12.1 UART.4 USB.4 V1.P$1 WDT.4 WDT_CON.6 X2.2 X2.4
GPIO0: GPIO.2 R68.1 U1.7
GPIO1: GPIO.4 R3.2 R66.1 U1.8
GPIO2: GPIO.6 R50.1 R96.1 TP3.P$1 U1.9
GPIO3: GPIO.8 R20.1 R67.1 U1.10
GPIO4: GPIO.10 U1.17
GPIO12: GPIO.16 R107.2 R117.2 U1.20
GPIO13: GPIO.18 GPS.4 U1.21
GPIO14: GPIO.20 U1.22
GPIO15: GPIO.22 GPS.2 U1.23
GPIO16: GPIO.24 GPS.3 U1.24
GPIO17: C121.1 GPIO.11 R21.1 S2.2 U1.25
GPIO18: GPIO.13 U1.26
GPIO19: GPIO.23 U1.27
GPIO20: GPIO.21 R26.1 U1.28
GPIO21: GPIO.19 U1.29
GPIO22: R7.1 U1.30
GPIO23: STATUS.A U1.31
LEDN1000_0: U1.100
LEDN1000_1: U1.102
LEDN1000_2: U1.104
LEDN1000_3: R123.1 U1.106
LEDN1000_4: R124.1 U1.108
LEDN_0: U1.99
LEDN_1: U1.101
LEDN_2: U1.103
LEDN_3: R17.1 U1.105
LEDN_4: R77.1 U1.107
MCT1-5: R1.1 R2.1 R8.1 R22.1 T1.36 T1.48
MCT2: R4.1 R33.2 T1.45
MCT3: R6.1 T1.42
MCT4: R29.1 T1.39
MCT6: R5.1 R25.1 T1.33
MCT7: R30.1 T1.30
MCT8: R31.1 T1.27
N$1: C137.2 T1.22
N$2: D14.A J1.PWR J3.1
N$3: Q11.3 R3.1 R44.1
N$4: C37.2 T1.19
N$5: C35.2 T1.16
N$6: C34.2 T1.13
N$7: Q9.P$4 R32.2 R57.2
N$8: C33.2 T1.10
N$9: C10.2 T1.4
N$10: C11.2 T1.7
N$11: C5.2 T1.1
N$12: R14.1 R15.2 U2.5
N$13: R9.1 R11.2 U6.5
N$14: Q11.1 R32.1
N$15 [gnd]: R34.1 R35.2 U3.5
N$16 [gnd]: R10.1 R12.2 U4.5
N$17: R58.1 U6.7
N$18: PCIE0.44 R109.1
N$19: C12.2 L8.P$1 U6.1
N$20: R19.1 U2.7
N$21: C13.2 L2.P$1 U2.1
N$22: C12.1 U6.2
N$23: P3_100.K R17.2
N$24: R13.1 U4.7
N$25: P4_100.K R77.2
N$26: 2G_WLAN.K R7.2
N$27: R23.2 STATUS.K
N$28: C13.1 U2.2
N$29: C45.2 U4.6
N$31: PCIE0.22 R106.2 R108.1
N$32: C45.1 R16.1
N$33: C32.1 R37.2
N$34: C32.2 U2.6
N$35: PWR.K R24.2
N$36 [gnd]: C49.2 R1.2 R2.2 R6.2 R29.2 R30.2 R31.2
N$37: R26.2 USB_LED.K
N$38: 5G_WLAN1.K R27.2
N$39: 5G_WLAN0.K R28.2
N$40: R36.1 U3.7
N$41: C24.2 U3.6
N$42: C24.1 R38.1
N$43: C21.2 L5.P$1 U3.1
N$44: C21.1 U3.2
N$46: C40.2 R4.2
N$47: C41.2 R5.2
N$49: PCIE1.22 R116.2 R118.1
N$53: R86.1 U12.26
N$60: C30.2 L3.P$1 U4.1
N$62: P3_1000.K R123.2
N$64: P4_1000.K R124.2
N$75: C30.1 U4.2
N$84 [gnd]: R45.1 R47.2 U5.5
N$85: R52.1 U5.7
N$86: C66.2 U5.6
N$87: C66.1 R54.1
N$88: C62.2 L4.P$1 U5.1
N$104: C16.1 R59.2
N$105: C16.2 U6.6
N$106: C62.1 U5.2
N$109: R81.2 U12.14
N$111: R82.1 U12.17
N$112: R83.1 U12.19
N$113: R84.2 R85.1 U12.18
N$114: C61.2 U12.2 X2.3
N$116: C63.2 U12.3 X2.1
P3_TRX0_N: J2.1-1 P5.1 T1.26
P3_TRX0_P: J2.1-2 P5.3 T1.25
P3_TRX1_N: J2.1-6 P8.1 T1.29
P3_TRX1_P: J2.1-3 P8.3 T1.28
P3_TRX2_N: J2.1-4 P7.1 T1.32
P3_TRX2_P: J2.1-5 P7.3 T1.31
P3_TRX3_N: J2.1-8 P6.1 T1.35
P3_TRX3_P: J2.1-7 P6.3 T1.34
P4_TRX0_N: J2.2-1 P4.1 T1.38
P4_TRX0_P: J2.2-2 P4.3 T1.37
P4_TRX1_N: J2.2-6 P3.1 T1.41
P4_TRX1_P: J2.2-3 P3.3 T1.40
P4_TRX2_N: J2.2-4 P2.1 T1.44
P4_TRX2_P: J2.2-5 P2.3 T1.43
P4_TRX3_N: J2.2-8 P1.1 T1.47
P4_TRX3_P: J2.2-7 P1.3 T1.46
PCIE0_CLK_N: PCIE0.11 R98.1 U1.124
PCIE0_CLK_P: PCIE0.13 R98.2 U1.125
PCIE0_RST_L: R108.2 U1.123
PCIE0_RX_N: R99.1 U1.127
PCIE0_RX_P: R100.1 U1.128
PCIE0_TX_N: R101.1 U1.130
PCIE0_TX_P: R102.1 U1.131
PCIE1_CLK_N: PCIE1.11 R49.1 U1.121
PCIE1_CLK_P: PCIE1.13 R49.2 U1.120
PCIE1_RST_L: R118.2 U1.122
PCIE1_RX_N: R80.1 U1.118
PCIE1_RX_P: R110.1 U1.117
PCIE1_TX_N: R111.1 U1.115
PCIE1_TX_P: R112.1 U1.114
POE_12V: D13.A R25.2
POE_OUT: Q9.P$5 Q9.P$6 Q9.P$7 Q9.P$8 R33.1
POWER_EN_3.3V: C90.2 GPIO.1 R60.2 U2.3 U6.3
POWER_EN_5V: C100.2 GPIO.3 R18.2 U3.3 U4.3 U5.3
REST: JP8.2 WDT.3
RST_B: C125.2 GPIO.5 JP8.1 R43.1 U1.6
S17_P0_TRX0_N: U1.51
S17_P0_TRX0_P: U1.50
S17_P0_TRX1_N: U1.53
S17_P0_TRX1_P: U1.52
S17_P0_TRX2_N: U1.55
S17_P0_TRX2_P: U1.54
S17_P0_TRX3_N: U1.57
S17_P0_TRX3_P: U1.56
S17_P1_TRX0_N: U1.60
S17_P1_TRX0_P: U1.59
S17_P1_TRX1_N: U1.62
S17_P1_TRX1_P: U1.61
S17_P1_TRX2_N: U1.64
S17_P1_TRX2_P: U1.63
S17_P1_TRX3_N: U1.66
S17_P1_TRX3_P: U1.65
S17_P2_TRX0_N: U1.68
S17_P2_TRX0_P: U1.67
S17_P2_TRX1_N: U1.70
S17_P2_TRX1_P: U1.69
S17_P2_TRX2_N: U1.72
S17_P2_TRX2_P: U1.71
S17_P2_TRX3_N: U1.74
S17_P2_TRX3_P: U1.73
S17_P3_TRX0_N: D7.P$2 T1.23 U1.77
S17_P3_TRX0_P: D7.P$1 T1.24 U1.76
S17_P3_TRX1_N: D6.P$2 T1.20 U1.79
S17_P3_TRX1_P: D6.P$1 T1.21 U1.78
S17_P3_TRX2_N: D3.P$2 T1.17 U1.81
S17_P3_TRX2_P: D3.P$1 T1.18 U1.80
S17_P3_TRX3_N: D4.P$2 T1.14 U1.83
S17_P3_TRX3_P: D4.P$1 T1.15 U1.82
S17_P4_TRX0_N: D11.P$2 T1.11 U1.86
S17_P4_TRX0_P: D11.P$1 T1.12 U1.85
S17_P4_TRX1_N: D10.P$2 T1.8 U1.88
S17_P4_TRX1_P: D10.P$1 T1.9 U1.87
S17_P4_TRX2_N: D8.P$2 T1.5 U1.90
S17_P4_TRX2_P: D8.P$1 T1.6 U1.89
S17_P4_TRX3_N: D9.P$2 T1.2 U1.92
S17_P4_TRX3_P: D9.P$1 T1.3 U1.91
SIM_CLK_0: C3.1 PCIE0.12 SIM0.CLK
SIM_DATA_0: C2.1 PCIE0.10 SIM0.IO
SIM_RST_0: C4.1 PCIE0.14 SIM0.RST
SIM_VCC_0: C1.1 C6.1 PCIE0.8 SIM0.VCC
SPI_CLK: U1.110
SPI_CS_L: U1.109
SPI_MISO: U1.112
SPI_MOSI: U1.111
UART_SIN: GPIO.12 R63.2 R64.2 U1.18
UART_SIN_HEADER: R64.1 UART.2
UART_SOUT: GPIO.14 U1.19 UART.3
USB1_N: U1.37 U12.15
USB1_P: U1.36 U12.16
USB2_N: PCIE0.36 U1.34
USB2_P: PCIE0.38 U1.33
USB11_N [usbtrace-4layer]: U12.10 USB.2
USB11_P [usbtrace-4layer]: U12.11 USB.3
USB12_N [usbtrace-4layer]: U12.8
USB12_P [usbtrace-4layer]: U12.9
USB13_N: D17.P$2 J5.6 U12.6
USB13_P: D5.P$2 J5.7 U12.7
USB14_N [usbtrace-4layer]: D15.P$2 J5.2 U12.4
USB14_P [usbtrace-4layer]: D12.P$2 J5.3 U12.5
USB_1.8V: C59.1 C60.1 U12.12 U12.28
USB_3.3V: C56.1 C57.1 R82.2 R83.2 R86.2 U12.13 U12.21
VIN1: D13.C D14.C D25.C L1.P$1 V1.P$2
W_DISABLE_L_0: PCIE0.20 R107.1
W_DISABLE_L_1: PCIE1.20 R117.1
WAKE_L_0: PCIE0.1 R96.2
WAKE_L_1: PCIE1.1 R20.2
WT_MISO: R50.2 WDT.6 WDT_CON.1
WT_MOSI: WDT.5 WDT_CON.4
WT_SLK: WDT.7 WDT_CON.3

## Tracks (layer width: path | path; a pad name or v marks a point on that pad's centre or on a via)
5G_WLAN_LED_0  (via drill 0.33)
  Top 0.254: v161.12,176.05 R28.1 | R109.2 47.15,152.98 v47.2,152.93
  Bottom 0.254: v161.12,176.05 160.61,176.56 142.07,176.56 137.88,172.36 122.26,172.36 118.83,175.79 101.68,175.79 100.16,174.27 96.73,174.27 90.13,167.67 85.55,167.67 81.87,171.35 42.25,171.35 40.22,169.32 36.41,169.32 35.77,168.68 35.77,167.16 41.49,161.44 41.49,157.12 45.68,152.93 v47.2,152.93
5G_WLAN_LED_1  (via drill 0.33)
  Top 0.254: v159.85,168.43 161.2,168.43 R27.1 | PCIE1.44 113.59,152.08 v113.62,152.04
  Bottom 0.254: v159.85,168.43 146.77,155.35 116.16,155.35 114.77,153.95 114.77,153.19 v113.62,152.04
5V0_2GPA
  Top 0.254: R45.2 7.58,77.88 6.81,78.64 6.81,89.31 9.86,92.35 15.07,92.35 16.09,91.34 16.09,88.93 16.59,88.42 L4.P$2 | C103.2 18.88,89.1 18.88,88.93
  Top 0.61: C64.1 C67.1
  Top 2.184: L4.P$2 18.88,88.42 18.88,88.93 18.88,93.37 43.39,93.37 43.39,96.42 47.15,96.42 U1.15
  pour Top (no thermals): 20.02,91.36 20.02,83.72 15.32,83.79 15.32,91.36
  pour Top (no thermals): 45.42,101.37 48.72,101.37 48.72,95.4 44.53,95.4 44.53,101.24 44.53,101.37 45.3,101.37
5V_1  (via drill 0.25 pad 1.27, 0.3, 0.33, 0.33 pad 1.42)  (1 unrouted)
  Top 0.254: C58.1 R85.2 | C46.1 21.18,43.82 v20.53,44.48 | v10.37,38.63 10.37,38.61 R10.2
  Top 0.305: D18.P$2 67.08,17.42 67.23,17.42 | R85.2 42.07,29.54 42.63,28.98 42.63,28.64 C54.1 | 26.5,45.75 26.5,42.37 C102.2
  Top 0.406: v47.71,29.11 47.71,28.6 46.99,27.88 U12.20 43.38,27.88 C54.1 | C31.1 25.08,43.82 25.08,45.85
  Top 0.61: C55.+ 36.2,27.84 36.23,27.86
  Top 0.813: J5.1 67.23,11.58 C130.2 67.23,17.42 67.23,30.51 | 67.23,30.51 67.23,33.93 50.2,33.93 v49.56,33.3 | USB.1 67.48,30.25 67.23,30.51 | 25.81,45.75 25.19,45.75 25.08,45.85 L3.P$2
  Top 1.27: 25.81,45.75 26.5,45.75 26.5,42.82 31.58,42.82 31.58,32.28 36.23,32.28 36.23,27.86 36.25,27.84 v37.8,27.84 | C31.1 C46.1 | v49.56,33.3 49.56,39.8 U1.39 U1.40 U1.41 U1.42 | 46.83,122.35 47.15,122.67 U1.4 | 46.83,121.44 47.06,121.21 U1.5
  Top 1.422: L3.P$2 22.7,48.43 25.61,51.33 25.61,61.49 26.88,62.76 30.36,62.76 GPIO.17 | v39.07,121.44 46.83,121.44 46.83,122.35
  Bottom 0.254: v20.53,44.48 12.91,44.48 11.13,42.7 11.13,39.4 v10.37,38.63
  Bottom 0.406: v47.71,29.11 47.71,29.74 47.39,30.06
  Bottom 0.813: J5.1 J5.5
  Bottom 1.27: v37.8,27.84 45.17,27.84 47.39,30.06 49.56,32.23 v49.56,33.3
  Bottom 1.422: GPIO.17 27.26,62.84 27.26,89.18 32.72,89.18 32.72,121.44 v39.07,121.44
  pour Top (no thermals): 20.38,51.13 27.11,51.08 27.11,44.02 20.38,44.07
  pour Top (no thermals): 48.6,41.55 60.54,41.55 60.54,38.63 48.6,38.63
  pour Top (no thermals): 45.04,124.36 45.04,120.42 48.72,120.42 48.72,124.36
5V_PCIE  (via drill 0.33 pad 1.68)
  Top 0.254: PCIE1.49 PCIE1.51 | C43.+ 99.14,141.38 98.64,141.88 | C42.2 27.39,138.71
  Top 0.305: R34.2 27.26,146.96 27.39,146.84 | L5.P$2 20.75,136.3 C25.1 C22.1
  Top 0.406: L5.P$2 22.73,134.39 v22.82,134.39 | PCIE0.49 PCIE0.51
  Top 1.676: L5.P$2 27.39,136.33 27.39,138.71 27.39,146.84 27.39,149.5 C27.+ 35.66,149.5 PCIE0.51 | v98.64,140.36 98.64,141.88 98.64,147.6 100.41,149.38 103.6,149.38 PCIE1.51
  Bottom 1.676: v22.82,134.39 32.85,134.39 34.63,136.17 53.68,136.17 55.84,134.01 92.29,134.01 v98.64,140.36
  pour Top (no thermals): 15.96,139.34 15.96,133.25 25.1,133.25 25.1,137.82 17.1,137.82 17.1,139.34
+3V3  (via drill 0.25 pad 0.58, 0.33, 0.33 pad 1.78, 0.33 pad 2.54)
  Top 0.254: R9.2 6.28,114.35 v5.8,114.83 | 5G_WLAN1.A 5G_WLAN0.A | UART.1 16.39,61.29 14.82,59.72 14.82,56.79 USB_LED.A | C124.2 17.74,99.37 WDT.8 18.5,98.93 | C92.2 19.41,127.56 L8.P$2 | v15.58,125.63 16.99,127.04 L8.P$2 | L8.P$2 16.99,124.18 C17.1 C14.1 | R21.2 53.8,9.25 53.8,10.19 44.91,19.08 43.9,19.08 38.06,24.92 35.52,24.92 29.55,30.89 v29.55,41.05
  Top 0.305: C92.2 C91.2 | PWR.A v133.05,127.79 134.45,129.18 140.8,129.18 141.31,128.68 141.31,128.3 2G_WLAN.A P3_100.A 140.42,115.98 134.45,115.98 133.05,117.37 P3_1000.A | PCIE1.24 113.59,160.08 113.88,159.79 R116.1 | v24.72,63.98 UART.1 | 20.15,98.7 v18.5,98.7 18.5,98.93
  Top 0.406: 20.15,107.47 20.02,107.59 R53.2 | R43.2 21.85,107.47 20.78,107.47
  Top 0.61: C14.1 18.22,123.09 20.91,123.09 20.91,107.47 20.78,107.47 20.15,107.47 20.15,98.7 20.15,96.67 v24.72,96.67 | v24.72,73.05 v24.72,73 GPIO.9 | C75.1 C116.1 102.62,153.24 103.08,153.7 104.06,153.7 104.48,153.28 | PCIE1.39 PCIE1.41 104.48,153.28 | 109.94,148.32 109.94,148.74 110.07,148.88 PCIE1.52 | 110.02,171.52 109.94,171.6 | 109.96,159.52 109.94,159.54 | PCIE1.24 110.03,160.08 109.94,160.17 | PCIE1.2 110.03,172.08 109.94,171.98 | 109.94,148.29 109.89,148.23 | 104.48,153.28 109.72,153.28 109.94,153.06
  Top 0.813: U1.96 U1.97 120.82,115.34 U1.98 | 109.94,171.98 109.94,171.6 109.94,160.17 109.94,159.54 109.94,153.06 109.94,148.74
  Top 1.016: 109.89,143.48 109.89,148.23 109.89,148.69 109.94,148.74
  Top 1.778: C20.1 C39.1 109.89,143.48 v109.81,143.41
  Top 2.54: L8.P$2 16.99,128.3 v17.1,128.3 | v124.16,113.82 120.82,113.82 120.82,115.34
  Bottom 0.254: v5.8,114.83 5.8,123.72 6.69,124.61 14.18,124.61 15.2,125.63 v15.58,125.63 | 147.02,154.71 158.45,166.14 163.79,166.14 5G_WLAN1.A | WDT_CON.2 7.09,98.93 8.21,97.82 12.28,97.82 12.91,98.45 18.24,98.45 v18.5,98.7 | v29.55,41.05 29.55,50.83 28.91,51.46 28.91,53.62 27.9,54.64 16.97,54.64 USB_LED.A
  Bottom 0.305: 2G_WLAN.A P4_100.A 141.94,138.2 | 141.94,138.2 140.93,139.22 134.45,139.22 P4_1000.A | v133.05,127.79 133.05,127.91 131.28,129.69 124.42,129.69 124.16,129.44 | 141.94,138.2 141.94,152.43 144.23,154.71 147.02,154.71 | v24.72,73 v24.72,63.98
  Bottom 0.61: v24.72,96.67 v24.72,73.05
  Bottom 1.778: v109.81,143.41 109.81,129.82 109.94,129.69
  Bottom 2.54: v17.1,128.3 17.1,126.64 37.04,126.64 37.04,131.85 52.41,131.85 52.41,123.09 99.65,123.09 99.65,129.69 109.94,129.69 124.16,129.69 124.16,129.44 v124.16,113.82
  pour Top (no thermals): 14.94,122.63 14.94,130.63 19.77,130.63 19.77,122.63
+3V3_PCIE  (via drill 0.25 pad 0.64, 0.25 pad 0.89, 0.33)
  Top 0.203: R106.1 47.07,159.66
  Top 0.254: v4.27,160.17 4.53,159.92 4.53,159.16 5.04,158.65 5.77,158.65 R14.2 | C71.2 C72.2 19.36,165.74 19.39,165.76 | C111.1 32.82,158.42 33.23,158.01 | 46.95,159.49 46.9,159.54 46.06,159.54 45.52,160.08 PCIE0.24 | L2.P$2 16,171.05 v14.38,172.67 | 17.1,165.76 17.1,164.75 C28.1 | C18.+ 25.23,165.89 25.36,165.76 | 36.28,153.95 36.28,154.08 35.52,154.08 35.52,153.95 | 35.52,153.95 35.52,153.19 35.64,153.19 35.64,153.95 35.52,153.95 | C8.1 29.93,165.76 | 29.93,165.76 30.18,165.76 | C7.1 30.94,165.76 31.07,165.76 | C9.1 29.93,165.76 | 29.93,165.76 29.8,165.76
  Top 0.406: C38.1 C28.1 | 46.95,159.49 R106.1 | PCIE0.39 PCIE0.41 | 33.36,163.73 v33.87,164.24 33.61,164.24 33.23,164.62 | C110.1 C111.1 | GPS.1 10.12,175.54 11.51,174.14 14.31,174.14 15.96,172.49 15.96,169.05 L2.P$2
  Top 0.61: PCIE0.39 33.48,154.08 33.23,154.33 | 41.87,150.77 41.87,150.27 42.12,150.01 42.12,149.25 42.49,148.88 PCIE0.52 | PCIE0.24 43.83,160.05 41.87,160.05 | PCIE0.2 41.83,172.08 39.83,170.08 v38.31,170.08
  Top 0.813: 41.87,150.77 41.87,160.05 41.87,160.81 38.44,164.24 v33.87,164.24 33.23,163.6 33.23,158.01 33.23,154.33 33.23,153.44 36.28,153.44 36.28,153.95
  Top 2.184: L2.P$2 16,166.86 17.1,165.76 19.39,165.76 25.36,165.76 29.8,165.76 30.18,165.76 31.07,165.76 32.09,165.76 33.23,164.62
  Bottom 0.254: v4.27,160.17 4.27,161.82 5.04,162.59 5.04,166.01 7.07,168.05 7.07,170.71 9.1,172.75 14.31,172.75 v14.38,172.67
  Bottom 0.61: v38.31,170.08 35.14,170.08 33.74,168.68 33.74,164.36 v33.87,164.24
  pour Top (no thermals): 18.4,172.11 18.4,164.13 14.18,164.13 14.18,172.11
+12V  (via drill 0.25 pad 1.02, 0.25 pad 2.18, 0.33 pad 1.02)
  Top 0.127: Q9.P$3 Q9.P$2 Q9.P$1
  Top 0.254: C29.1 C36.1 | R57.1 168.23,46.13 167.77,45.67 Q9.P$3 | R18.1 15.27,47.45 14.44,48.29 4.15,48.29 4.15,48.54 | R60.1 9.3,127.46 8.08,128.68 2.88,128.68
  Top 0.305: U6.8 14.94,117.12 C15.1 C19.1 | 12.89,28.52 12.81,28.6 | C44.1 17.81,36.52 U4.8 | 12.3,158.37 12.4,158.37 12.4,157.89
  Top 0.406: C65.1 12.58,78.1 U5.8 | 16.72,116.48 16.72,117.31 C19.1 | U3.8 10.51,141.24 C23.1 C26.1
  Top 0.61: 12.4,157.89 12.4,158.01 | U2.8 10.85,158.01 12.4,158.01 | 12.4,158.01 12.4,158.69 C29.1
  Top 0.813: 14.82,75.59 14.94,75.59 C65.1 C68.1 | C23.1 2.88,138.46
  Top 1.016: v26.63,39.52 26.63,36.73 22.13,36.73 C53.1 20.91,36.52 C44.1 | v130,46.63 130,42.82 45.8,42.82 v45.8,39.52 | v169.88,47.52 170.31,47.52 Q9.P$1
  Top 1.27: 20.91,31.09 13.98,31.09 12.81,29.92 12.81,28.6 D2.C | 20.94,31.09 20.91,31.09 | 20.91,31.09 20.91,36.52
  Top 1.422: D2.C 10.19,25.02 7.75,22.58 C76.+ | 14.82,75.59 14.82,71.53 2.88,71.53 2.88,71.91
  Top 1.676: 3,76.73 2.88,76.86 | 2.88,110.01 14.94,110.01 14.94,116.48 16.72,116.48
  Top 2.184: C76.+ 7.75,10.93 L1.P$2 | 12.4,157.89 12.4,150.75 2.88,150.75 2.88,138.46 2.88,128.68 2.88,110.01 2.88,76.86 2.88,71.91 2.88,56.03 4.15,56.03 4.15,48.54 v4.15,46.13
  Bottom 0.813: 33.23,39.52 33.36,39.52 33.36,52.68 GPIO.26
  Bottom 1.016: v26.63,39.52 33.23,39.52 | v130,46.63 130,51.46 169.88,51.46 v169.88,47.52 | v45.8,39.52 33.36,39.52
  Bottom 2.184: C76.+ 7.75,22.58 4.12,26.21 4.12,46.1 v4.15,46.13
  pour Top (no thermals): 17.53,37.49 26.98,37.49 26.98,32.79 17.53,32.79
  pour Top (no thermals): 10.55,159.26 18.02,159.26 18.02,156.64 10.55,156.64
  pour Top (no thermals): 12.1,117.98 19.44,117.98 19.44,115.01 12.1,115.01
  pour Top (no thermals): 18.09,74.8 12.43,74.8 12.43,78.82 18.09,78.82
  pour Top (no thermals): 167.6,46 171.03,46 171.03,43.97 167.6,43.97
/WT_RST
  Top 0.254: WDT_CON.5 9.63,104.7 11.54,106.6 C126.2 | R53.1 C126.2 | C126.2 17.9,106.46 WDT.1
AGND  (via drill 0.25 pad 1.27)
  Top 1.27: P5.2 v92.34,22.73 | P8.2 v100.34,22.73 | P7.2 v108.34,22.73 | P6.2 v116.34,22.73 | P4.2 v124.34,22.73 | P3.2 v132.34,22.73 | P2.2 v140.34,22.73 | P1.2 148.58,22.71 v148.6,22.73 | EARTH.2 EARTH.4
  Bottom 1.27: v92.34,22.73 v100.34,22.73 v108.34,22.73 v116.34,22.73 v124.34,22.73 v132.34,22.73 v140.34,22.73 | v148.6,22.73 v140.34,22.73 | v140.34,22.73 140.34,7.62 140.26,7.62 J2.S2 | J2.S1 95.46,5.34 EARTH.3
  Bottom 1.676: v92.34,22.73 93.65,21.42 93.65,7.77 EARTH.3 EARTH.1 EARTH.2
CLKREQ_L_0
  Top 0.203: PCIE0.7 TP1.P$1
CLKREQ_L_1
  Top 0.203: PCIE1.7 103.63,170.26 TP2.P$1
COM_A_2G
  Top 0.254: U1.2 47.05,128.17 44.41,128.17 43.77,128.8 SV1.1
COM_B_2G
  Top 0.254: U1.3 47,125.63 45.04,125.63 43.14,123.72 SV1.3
CON_PER0_N
  Top 0.203: R99.2 49.59,146.02 48.94,146.02 47.16,147.8 41.95,147.8 41.31,148.45 41.31,149.33 40.42,150.22 40.42,158.22 38.39,160.25 36.58,160.25 36.53,160.3 35.84,160.3 PCIE0.23
CON_PER0_P
  Top 0.203: R100.2 49.54,145.62 48.77,145.62 46.99,147.4 41.78,147.4 40.9,148.28 40.9,149.17 40.01,150.06 40.01,158.06 38.23,159.84 35.82,159.84 PCIE0.25
CON_PER1_N
  Top 0.203: R80.2 101.43,160.25 103.48,160.25 PCIE1.23
CON_PER1_P
  Top 0.203: R110.2 101.41,159.84 103.54,159.84 PCIE1.25
CON_PET0_N
  Top 0.203: R101.2 49.59,143.36 48.17,143.36 45.51,146.02 40.17,146.02 38.39,147.81 38.39,155.81 37.12,157.07 36.41,157.07 36.2,157.28 PCIE0.31
CON_PET0_P
  Top 0.203: R102.2 49.56,142.95 48.01,142.95 45.34,145.62 40,145.62 37.98,147.64 37.98,155.64 36.96,156.67 36.41,156.67 36.22,156.48 PCIE0.33
CON_PET1_N
  Top 0.203: PCIE1.31 102.65,157.28 102.45,157.07 101.35,157.07 R111.2
CON_PET1_P
  Top 0.203: PCIE1.33 102.64,156.48 102.45,156.67 101.43,156.67 101.43,156.64 R112.2
GND  (via drill 0.33 pad 0.41, 0.58 pad 0.25)  (1 unrouted)
  Top 0.406: C49.1 165.29,33.91 164.93,33.55 163.71,33.55 v163.69,33.58 | PCIE0.50 44.36,149.68 44.41,149.63
  Top 2.184: J1.GND@1 39.36,4.47 J1.GND@2 42.86,11.86 38.92,15.8 38.92,21.31 37.7,22.53 36.22,22.53 C55.-
  Bottom 0.406: C137.1 C37.1 C35.1 C34.1 C33.1 C11.1 C10.1 C5.1
  Bottom 1.422: v163.69,33.58 163.69,32.81 R22.2 155.8,32.81 155.28,32.28 153.75,32.28 C40.1 147.79,32.41 147.66,32.54 | 147.66,32.54 C41.1 | R8.2 147.79,32.67 147.66,32.54